# EAGLE board schematic_chess_board_2_v9 (EAGLE 9.7.0)
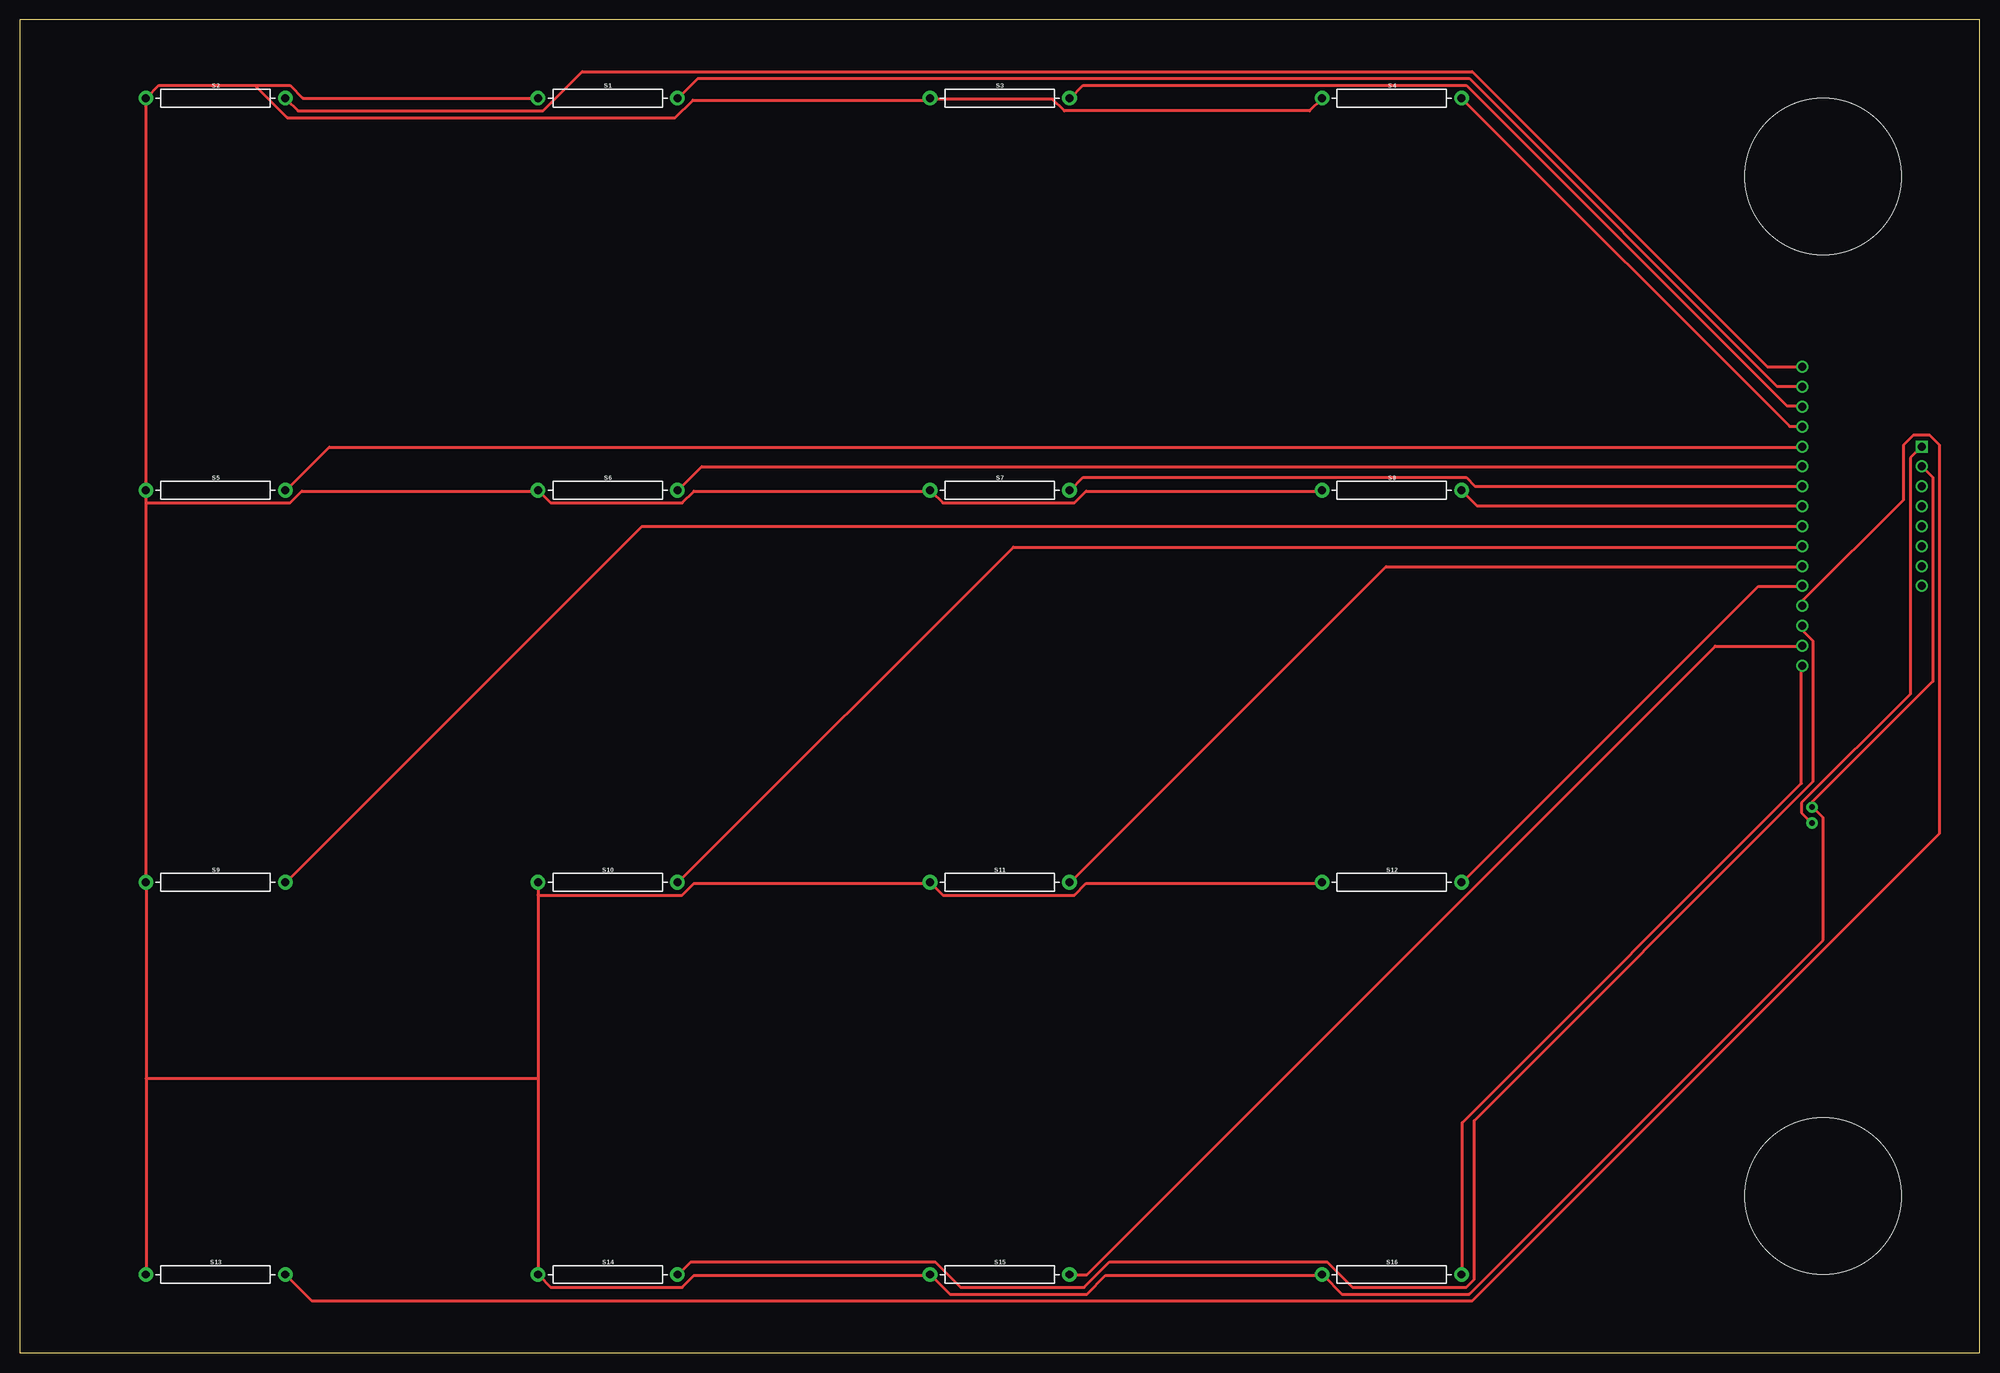
[diagram p0: board, top side]
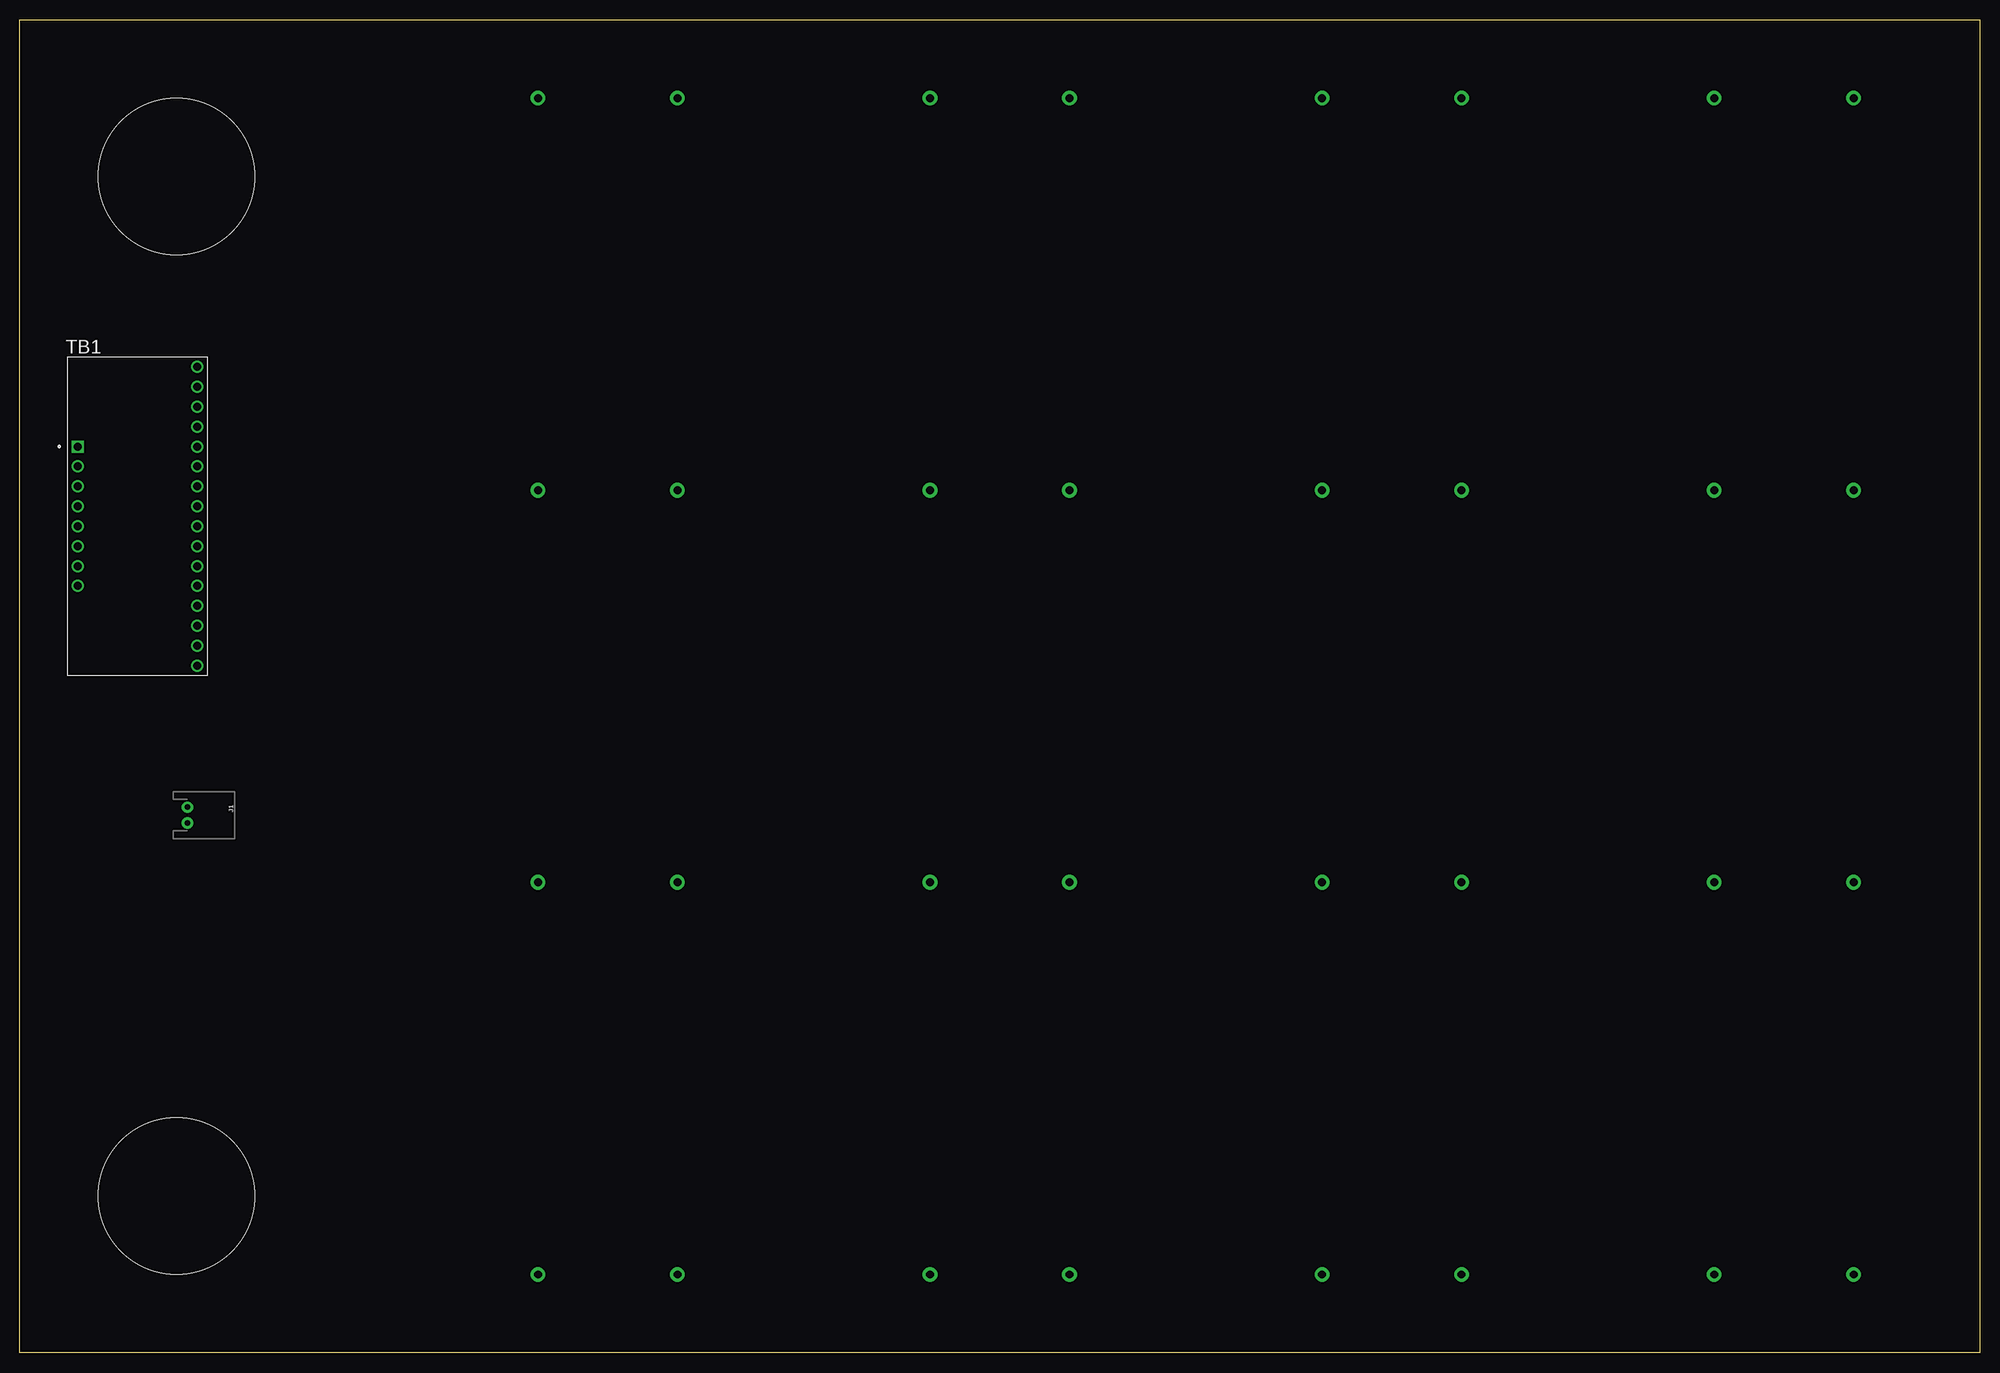
[diagram p1: board, bottom side, seen from below]

Size 250 x 170 mm. Coordinates in mm from the lower left corner, seen from the top.
Outline: 0,170 0,0 250,0 250,170 0,170
Copper layers (1*16): Top 0.035mm / dielectric 1.5mm / Bottom 0.035mm
Design rules "default *": minimum track width 0.4mm, minimum drill 0.2mm, track to track 0.4mm, track to pad 0.4mm, pad to pad 0.4mm, via to via 0.6mm, smd to smd 0.4mm, copper to edge 40mil, drill to drill 0.6mm, minimum pad ring 10mil, minimum via ring 8mil, stop-mask expansion 4mil, vias tented up to drill 0mil, thermal gap 10mil
Holes 20 mm at 230,20 230,150

## Footprints (pad centres in the part's own frame; a part is rotated, then mirrored left to right if it is on the bottom)
JST-2-PTH-KIT = drill 0.7 pad 1.448: 1 -1,0; 2 1,0
REED_SWITCH_GLASS = drill 1.016 pad 1.88: P$1 -8.89,0; P$2 8.89,0
XDCR_BOB-09056 = drill 1.02 square: 1 -7.62,8.89 | drill 1.02: 2 -7.62,6.35; 3 -7.62,3.81; 4 -7.62,1.27; 5 -7.62,-1.27; 6 -7.62,-3.81; 7 -7.62,-6.35; 8 -7.62,-8.89; 9 7.62,19.05; 10 7.62,16.51; 11 7.62,13.97; 12 7.62,11.43; 13 7.62,8.89; 14 7.62,6.35; 15 7.62,3.81; 16 7.62,1.27; 17 7.62,-1.27; 18 7.62,-3.81; 19 7.62,-6.35; 20 7.62,-8.89; 21 7.62,-11.43; 22 7.62,-13.97; 23 7.62,-16.51; 24 7.62,-19.05

## Placement (x,y rotation side)
J1  [JST-2-PTH-KIT]  228.6,68.58 270 bottom
S1  REED_SWITCH-PTH-GLASS  [REED_SWITCH_GLASS]  75,160 0 top
S2  REED_SWITCH-PTH-GLASS  [REED_SWITCH_GLASS]  25,160 0 top
S3  REED_SWITCH-PTH-GLASS  [REED_SWITCH_GLASS]  125,160 0 top
S4  REED_SWITCH-PTH-GLASS  [REED_SWITCH_GLASS]  175,160 0 top
S5  REED_SWITCH-PTH-GLASS  [REED_SWITCH_GLASS]  25,110 0 top
S6  REED_SWITCH-PTH-GLASS  [REED_SWITCH_GLASS]  75,110 0 top
S7  REED_SWITCH-PTH-GLASS  [REED_SWITCH_GLASS]  125,110 0 top
S8  REED_SWITCH-PTH-GLASS  [REED_SWITCH_GLASS]  175,110 0 top
S9  REED_SWITCH-PTH-GLASS  [REED_SWITCH_GLASS]  25,60 0 top
S10  REED_SWITCH-PTH-GLASS  [REED_SWITCH_GLASS]  75,60 0 top
S11  REED_SWITCH-PTH-GLASS  [REED_SWITCH_GLASS]  125,60 0 top
S12  REED_SWITCH-PTH-GLASS  [REED_SWITCH_GLASS]  175,60 0 top
S13  REED_SWITCH-PTH-GLASS  [REED_SWITCH_GLASS]  25,10 0 top
S14  REED_SWITCH-PTH-GLASS  [REED_SWITCH_GLASS]  75,10 0 top
S15  REED_SWITCH-PTH-GLASS  [REED_SWITCH_GLASS]  125,10 0 top
S16  REED_SWITCH-PTH-GLASS  [REED_SWITCH_GLASS]  175,10 0 top
TB1  BOB-09056  [XDCR_BOB-09056]  234.95,106.68 0 bottom

## Library data of the parts
J1 = SparkFun-Connectors
S1-S16 = SparkFun-Switches; PROD_ID: SWCH-09282; SF_SKU: COM-08642
TB1 = BOB-09056; AVAILABILITY: In Stock; CHECK_PRICES: https://www.snapeda.com/parts/BOB-09056/SparkFun+Electronics/view-part/?ref=eda; DESCRIPTION: 74HC4067 Analog and Digital Switch Interface Evaluation Board; MF: SparkFun Electronics; MP: BOB-09056; PACKAGE: None; PRICE: None; PURCHASE-URL: https://www.snapeda.com/api/url_track_click_mouser/?unipart_id=482777&manufacturer=SparkFun Electronics&part_name=BOB-09056&search_term=None; SNAPEDA_LINK: https://www.snapeda.com/parts/BOB-09056/SparkFun+Electronics/view-part/?ref=snap

## Nets
5V: J1.1 S1.P$1 S2.P$1 S3.P$1 S4.P$1 S5.P$1 S6.P$1 S7.P$1 S8.P$1 S9.P$1 S10.P$1 S11.P$1 S12.P$1 S13.P$1 S14.P$1 S15.P$1 S16.P$1 TB1.2
GND: J1.2 TB1.1
N$3: S2.P$2 TB1.9
N$4: S1.P$2 TB1.10
N$5: S3.P$2 TB1.11
N$6: S4.P$2 TB1.12
N$7: S5.P$2 TB1.13
N$8: S6.P$2 TB1.14
N$9: S7.P$2 TB1.15
N$10: S8.P$2 TB1.16
N$11: S9.P$2 TB1.17
N$12: S10.P$2 TB1.18
N$13: S11.P$2 TB1.19
N$14: S12.P$2 TB1.20
N$15: S13.P$2 TB1.21
N$16: S14.P$2 TB1.22
N$17: S15.P$2 TB1.23
N$18: S16.P$2 TB1.24

## Tracks (layer width: path | path; a pad name or v marks a point on that pad's centre or on a via)
5V
  Top 0.4: TB1.2 242.62,113 244,111.62 244,85.62 228.62,70.25 228.62,69.62 J1.1 228.75,69.5 230,68.25 230,52.62 184.88,7.5 168.62,7.5 166.25,9.88 S16.P$1 166,9.88 138.5,9.88 136.12,7.5 118.62,7.5 116.25,9.88 S15.P$1 116,9.88 86,9.88 84.5,8.38 67.75,8.38 66.25,9.88 S14.P$1 66.12,10 66.12,35 | 66.12,58.38 66.12,59.88 S10.P$1 | 66.12,58.38 66.12,35 | 66.12,58.38 84.5,58.38 86,59.88 116,59.88 S11.P$1 116.25,59.88 117.75,58.38 134.5,58.38 136,59.88 166,59.88 S12.P$1 | S4.P$1 166,159.88 164.5,158.38 133.25,158.38 131.75,159.88 116.12,159.88 S3.P$1 116,159.75 85.88,159.75 83.62,157.5 34.12,157.5 30.12,161.5 30.12,161.62 | 16.12,35 16.12,59.88 S9.P$1 16.12,60.12 16.12,108.38 | 16.12,35 16.12,10 S13.P$1 | 16.12,108.38 16.12,109.88 S5.P$1 16.12,110.12 16.12,159.88 S2.P$1 16.25,160.12 17.75,161.62 30.12,161.62 | 16.12,108.38 34.5,108.38 36,109.88 66,109.88 S6.P$1 66.25,109.88 67.75,108.38 84.5,108.38 86,109.88 116,109.88 S7.P$1 116.25,109.88 117.75,108.38 134.5,108.38 136,109.88 166,109.88 S8.P$1 | 30.12,161.62 34.5,161.62 36.12,160 66,160 S1.P$1 | 16.12,35 66.12,35
GND
  Top 0.4: TB1.1 241.12,114.12 241.12,84 227.25,70.12 227.25,68.88 228.5,67.62 J1.2
N$3
  Top 0.4: TB1.9 227.25,125.75 222.88,125.75 185.25,163.38 71.75,163.38 66.75,158.38 35.5,158.38 34,159.88 S2.P$2
N$4
  Top 0.4: TB1.10 227.25,123.25 224.12,123.25 184.88,162.5 86.5,162.5 84,160 S1.P$2
N$5
  Top 0.4: TB1.11 227.25,120.75 225.38,120.75 184.5,161.62 135.62,161.62 134,160 S3.P$2
N$6
  Top 0.4: TB1.12 227.25,118.12 225.75,118.12 184,159.88 S4.P$2
N$7
  Top 0.4: TB1.13 227.25,115.5 39.5,115.5 34,110 S5.P$2
N$8
  Top 0.4: TB1.14 227.25,113 87,113 84,110 S6.P$2
N$9
  Top 0.4: TB1.15 227.25,110.5 185.62,110.5 184.5,111.62 135.62,111.62 134,110 S7.P$2
N$10
  Top 0.4: TB1.16 227.25,108 185.88,108 184,109.88 S8.P$2
N$11
  Top 0.4: TB1.17 227.25,105.38 79.38,105.38 34,60 S9.P$2
N$12
  Top 0.4: TB1.18 227.25,102.75 126.75,102.75 84,60 S10.P$2
N$13
  Top 0.4: TB1.19 227.25,100.25 174.25,100.25 134,60 S11.P$2
N$14
  Top 0.4: TB1.20 227.25,97.75 221.75,97.75 184,60 S12.P$2
N$15
  Top 0.4: TB1.21 227.38,95.25 227.38,95.88 240.25,108.75 240.25,115.75 241.5,117 243.62,117 244.88,115.75 244.88,66.25 185.25,6.62 37.25,6.62 34,9.88 S13.P$2
N$16
  Top 0.4: TB1.22 227.38,92.62 227.38,92.12 228.75,90.75 228.75,72.88 185.5,29.62 185.5,9.38 184.5,8.38 170,8.38 166.75,11.62 139,11.62 135.75,8.38 120,8.38 116.75,11.62 85.62,11.62 84,10 S14.P$2
N$17
  Top 0.4: TB1.23 227.25,90.12 216.25,90.12 136.12,10 134,10 S15.P$2
N$18
  Top 0.4: TB1.24 227.25,87.62 227.25,72.62 184,29.38 184,10 S16.P$2